# Altium PCB PCB1.PcbDoc (part 2 of 2)
Units mil, origin at the board's own origin, x right, y up, seen from the top; angles counter-clockwise.
Board outline 6000 x 4000 mil, 2 copper layers (Top Layer, Bottom Layer); 103 components, 58 nets, 299 pads, 28 vias.
Unrouted connection lines stored in the file: 129.
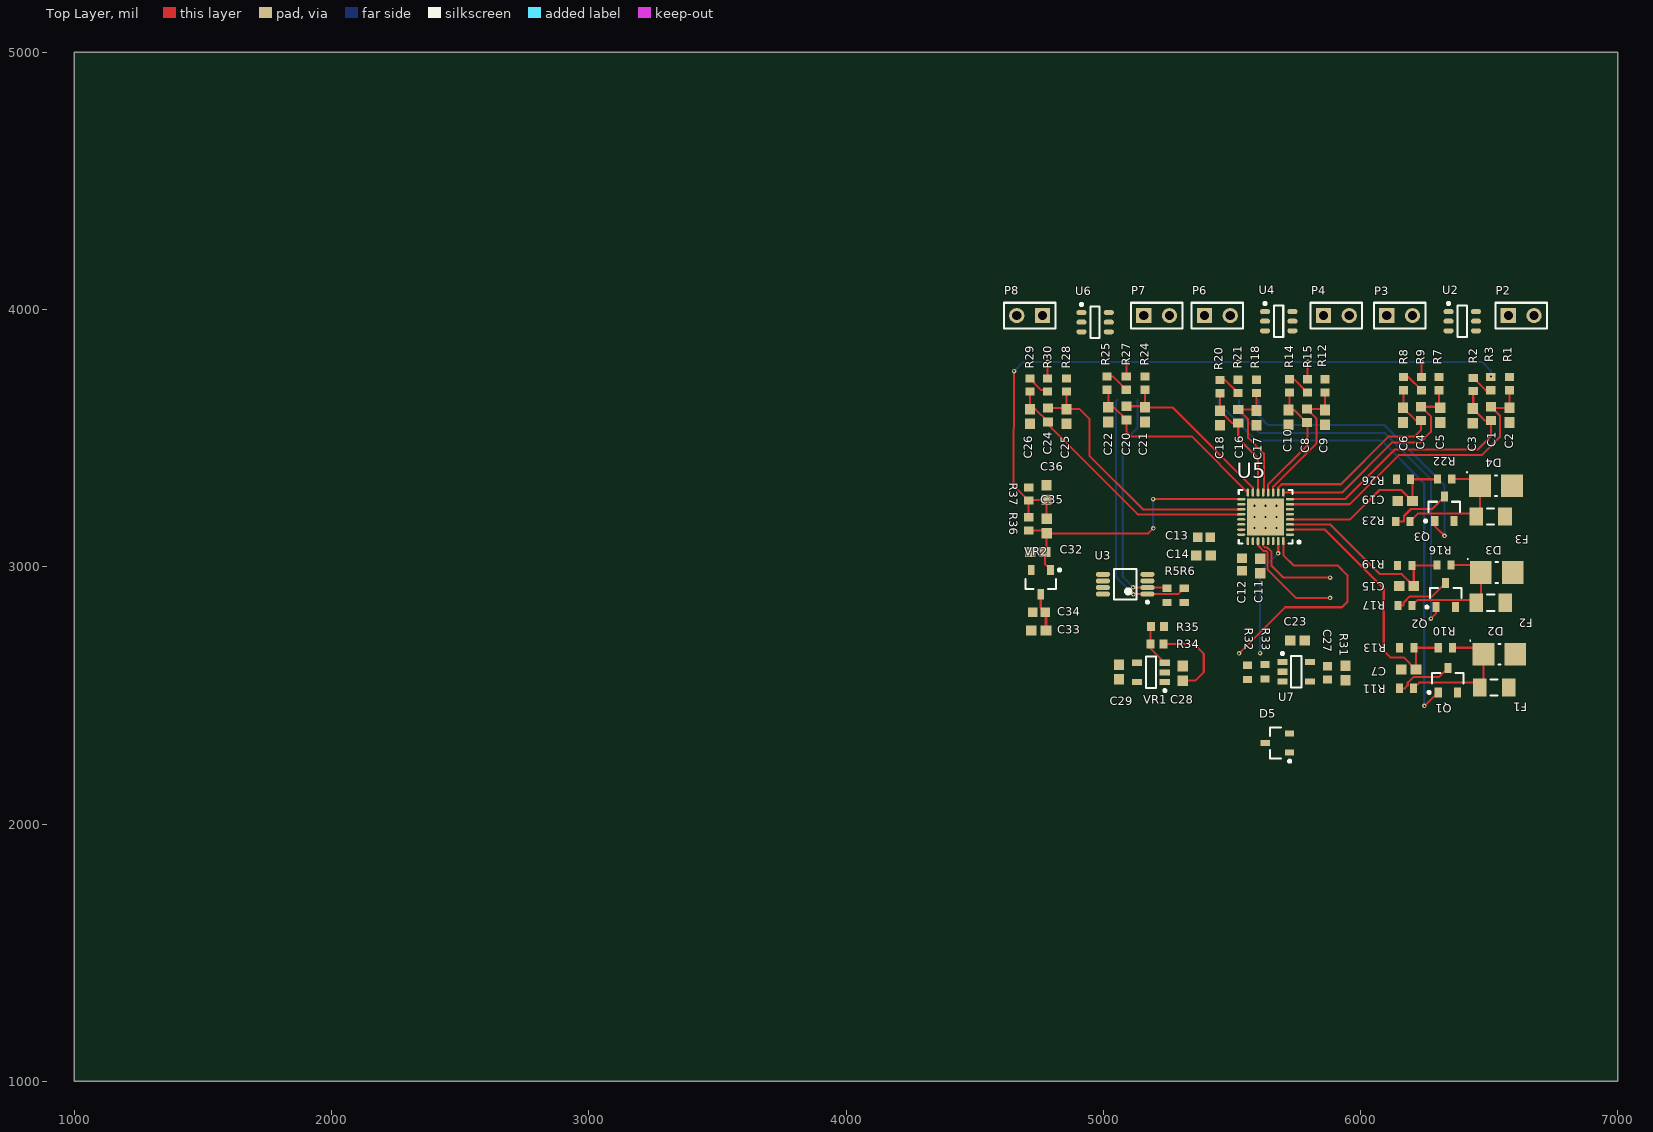
[diagram p0: Top Layer view]

## Via types
v1: diameter 17.72, hole 7.87, Top Layer to Bottom Layer, 19 vias
v2: diameter 19.68, hole 7.87, Top Layer to Bottom Layer, 9 vias

## Nets (pads, with @x,y where several pads share a name; then routed paths per layer and width w, separated by ;. In a path a pad name is that pad's centre, name@x,y a point inside that pad or via, vN(x,y) a via of type N, cw(c..) or ccw(c..) an arc to the next point about the centre after c; other vN are vias at no path point) (continued)
NetR34_1: R34.1 R35.2 VR1.3 | length 164.2
  Top Layer w8: R35.2 5183.07,2765.1 R34.1 5183.07,2683.19 VR1.3
NetR35_1: R35.1 U1.6
SPI2_MISO: U1.18 U5.27 | length 419.9
  Top Layer w8: U5.27 5601.65,3083.76 5624.42,3061 5633.89,3061 5639.16,3055.73 5639.16,2988.8 5749.02,2878.94 v1(5881.89,2878.94)
SPI2_MOSI: U1.17 U5.28 | length 361.3
  Top Layer w8: U5.28 5621.34,3082.46 5629.14,3074.66 5638.61,3074.66 5653.54,3059.72 5653.54,3004.92 5700.79,2957.68 v1(5881.89,2957.68)
SPI2_NSS: U1.21 U5.32 | length 942.6
  Top Layer w8: v1(5528.54,2663.39) 5707.68,2842.52 5928.15,2842.52 5948.82,2863.19 5948.82,2967.52 5911.42,3004.92 5740.16,3004.92 5700.08,3045 U5.32
SPI2_SCK: U1.20 U5.31 | length 464.1
  Top Layer w8: v1(5680.12,3052.17) 5680.39,3052.44 U5.31
  Bottom Layer w8: v1(5610.24,2664.37) 5610.24,2982.28 v1(5680.12,3052.17)
TC_N1: C1.2 C3.2 R2.1 U5.8 | length 1104.2
  Top Layer w8: U5.8 5939.96,3262.8 6132.87,3455.71 6456.69,3455.71 6507.61,3506.62 C1.2 6483.03,3568.73 C3.2 6438.54,3617.16 R2.1
TC_N2: C4.2 C6.2 R8.1 U5.10 | length 865.1
  Top Layer w8: U5.10 5680.39,3307.37 5693.89,3320.87 5924.21,3320.87 6110.24,3506.89 6210.63,3506.89 6235.97,3532.23 C4.2 6214.15,3568.9 C6.2 6167.87,3621.04 R8.1
TC_N3: C8.2 C10.2 R14.1 U5.12 | length 497.2
  Top Layer w8: U5.12 5641.02,3320.16 5794.29,3473.43 5794.29,3557.63 C8.2 5742.39,3609.53 C10.2 5723.5,3612.46 R14.1
TC_N4: C16.2 C18.2 R20.1 U5.14 | length 460.9
  Top Layer w8: R20.1 C18.2 5501.93,3558.43 C16.2 5524.81,3498.81 5601.65,3421.97 U5.14
TC_N5: C20.2 C22.2 R25.1 U5.16 | length 777.2
  Top Layer w8: R25.1 5019.69,3683.07 C22.2 5041.51,3619.99 C20.2 5090.72,3524.44 5108.27,3506.89 5343.78,3506.89 U5.16
TC_N6: C24.2 C26.2 R29.1 U5.20 | length 1066.2
  Top Layer w8: R29.1 C26.2 4736.46,3612.64 C24.2 4785.67,3551.93 5133.86,3203.74 U5.20
TC_P1: C1.1 C2.1 R1.1 U5.7 | length 1191.7
  Top Layer w8: U5.7 5957.68,3243.11 6148.62,3434.06 6471.46,3434.06 6542.32,3504.92 6542.32,3587.17 C1.1@6511.55,3617.94 ; C1.1 C1.1@6511.55,3617.94 ; R1.1 6578.74,3618.01 C2.1 C1.1@6511.55,3617.94
TC_P2: C4.1 C5.1 R7.1 U5.9 | length 919.1
  Top Layer w8: U5.9 5928.15,3288.39 6122.05,3482.28 6231.3,3482.28 6273.62,3524.61 6273.62,3584.4 C4.1 6306.1,3622.05 6305.04,3623.11 R7.1
TC_P3: C8.1 C9.1 R12.1 U5.11 | length 551.6
  Top Layer w8: U5.11 5660.71,3311.83 5829.72,3480.84 5829.72,3575.34 C8.1 5858.7,3613.46 C9.1 R12.1
TC_P4: C16.1 C17.1 R18.1 U5.13 | length 506.6
  Top Layer w8: R18.1 C17.1 5591.91,3611.57 C16.1 5562.99,3573.4 5562.99,3500.98 5624.53,3439.44 5624.53,3291.58 U5.13
TC_P5: C20.1 C21.1 R24.1 U5.15 | length 703.9
  Top Layer w8: C20.1 C21.1@5157.82,3623.93 ; R24.1 C21.1 5269.35,3619.99 5581.97,3307.37 U5.15
TC_P6: C24.1 C25.1 R28.1 U5.19 | length 1066
  Top Layer w8: C24.1 4852.77,3616.57 C25.1 ; R28.1 4856.7,3679.69 C25.1 ; U5.19 5154.53,3223.43 4945.87,3432.09 4945.87,3574.8 4908.03,3612.64 C25.1
USART2_RX: P1.2 U1.27
USART2_TX: P1.1 U1.28
V\I1: Q1.1 U1.7 | length 1881.3
  Top Layer w8: v1(6248.03,2459.65) 6250.4,2459.65 Q1.1
  Bottom Layer w8: U1.7 5448.82,3635.89 5593.57,3491.14 6080.71,3491.14 6248.03,3323.82 v1(6248.03,2459.65)
V\I2: Q2.1 U1.8 | length 1497.4
  Top Layer w8: v1(6273.62,2798.23) 6293.92,2818.53 Q2.1
  Bottom Layer w8: U1.8 5527.56,3600.39 5607.28,3520.67 6093.5,3520.67 6273.62,3340.55 v1(6273.62,2798.23)
V\I3: Q3.1 U1.9 | length 1165.7
  Top Layer w8: Q3.1 6288.92,3157.93 v1(6326.77,3120.08)
  Bottom Layer w8: U1.9 5606.3,3584.65 5639.76,3551.18 6092.52,3551.18 6326.77,3316.93 v1(6326.77,3120.08)
Vbat: C28.1 D5.3 P9.2 R32.1 R34.2 U1.15 VR1.1 | length 338.6
  Top Layer w8: R34.2 5352.19,2699.97 5390.75,2661.42 5390.75,2590.55 5357.36,2557.17 C28.1
Vbias: C35.1 C36.2 R3.2 R9.2 R15.2 R21.2 R27.2 R30.2 R36.2 R37.1 | length 2891.1
  Top Layer w8: v1@4652.56,3760.83 4651.57,3315.61 R37.1 ; R36.2 R37.1 ; C35.1 4779.34,3187.84 C36.2 4713.28,3259.91 R37.1 ; R30.2 4783.7,3795.51 v1(4784.45,3796.26) ; R27.2 5089.69,3795.39 v1(5090.55,3796.26) ; R15.2 5793.57,3793.57 v1(5796.26,3796.26) ; v1(6237.2,3796.26) 6237.94,3795.52 R9.2
  Bottom Layer w8: v1(4653.54,3760.83) 4688.98,3796.26 v1(4784.45,3796.26) v1(5090.55,3796.26) v1(5525.59,3796.26) v1(5796.26,3796.26) v1(6237.2,3796.26) 6472.44,3796.26 6506.89,3761.81 v1(6506.89,3739.17)
Vref: C32.2 C35.2 R36.1 U5.17 VR2.1 | length 1107.5
  Top Layer w8: R36.1 4768.78,3141.32 C35.2 ; VR2.1 4773.82,3009.02 C32.2 4780.28,3064.26 C35.2 ; v1(5193.9,3262.8) U5.17 ; v1(5194.88,3149.61) 5175.1,3129.82 C35.2
  Bottom Layer w8: v1(5193.9,3262.8) 5193.9,3150.59 v1(5194.88,3149.61)
pads on no net: D5.2 P5.1 P5.4 P5.7 U1.4 U1.5 U1.11 U1.12 U1.13 U1.22 U1.23 U1.24 U1.25 U1.26 U3.3 U5.25 U5.26 U5.29 U5.30 U5.33 VR1.4
copper on no net:
  other v2: 5587.87,3150.59 5631.18,3150.59 5674.49,3150.59 5587.87,3193.9 5631.18,3193.9 5674.49,3193.9 5587.87,3237.2 5631.18,3237.2 5674.49,3237.2

## Text inside footprints (layer, text, board x,y; h text height)
U1: Bottom Overlay "LoRa Module V1" at 5566.93,3136.81 h32